# EAGLE board am-1801 (EAGLE 6.4)
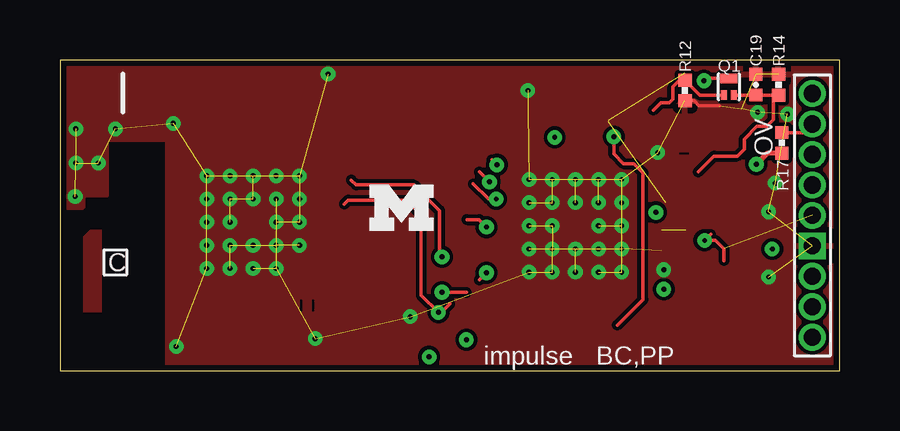
[diagram p0: board, top side]
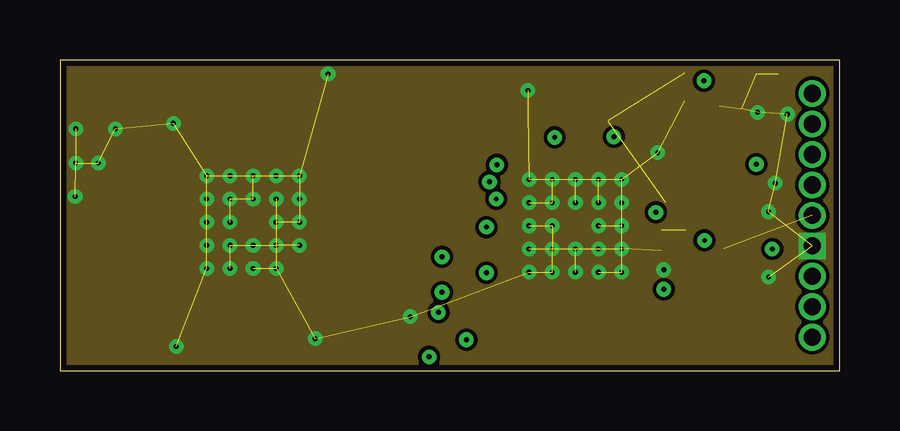
[diagram p1: board, inner layer Route2]
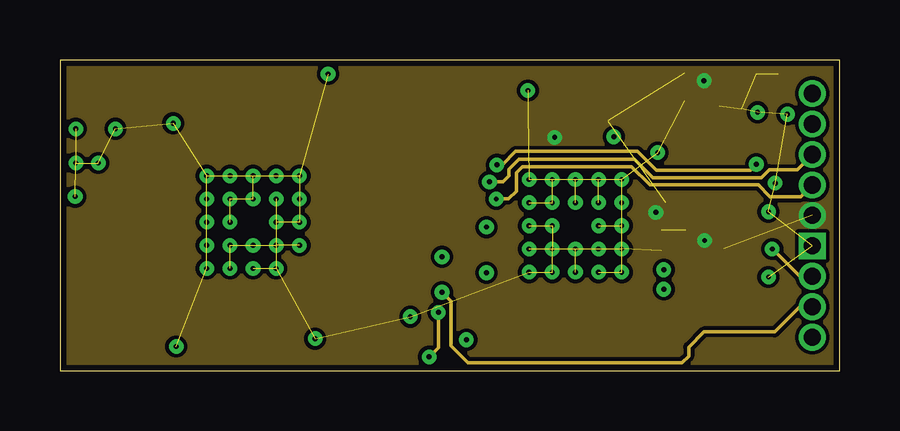
[diagram p2: board, inner layer Route15]
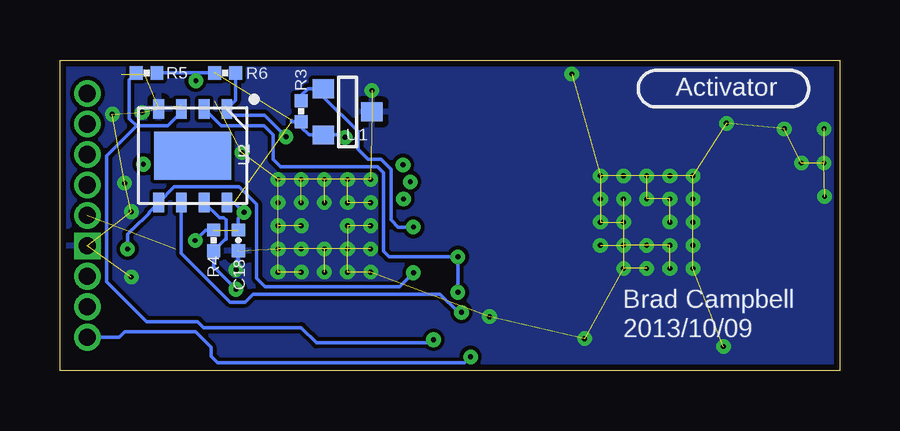
[diagram p3: board, bottom side, seen from below]

Size 32.51 x 12.95 mm. Coordinates in mm from the lower left corner, seen from the top.
Outline: 0,0 32.51,0 32.51,12.95 0,12.95 0,0
Copper layers (1+2*15+16): Top 0.0178mm / dielectric 12mil / Route2 0.0356mm / dielectric 28mil / Route15 0.0356mm / dielectric 12mil / Bottom 0.0178mm
Design rules "sunstone-4lyr_v1.0.0.3 *": minimum track width 6mil, minimum drill 8mil, track to track 6mil, track to pad 6mil, pad to pad 6mil, via to via 6mil, smd to smd 6mil, copper to edge 10mil, drill to drill 16mil, minimum pad ring 8mil, minimum via ring 8mil, stop-mask expansion 3mil, vias tented up to drill 8mil, thermal gap 10mil
tRestrict: area 10,2.5 to 10.1,3; area 10.5,2.5 to 10.6,3; area 25.8,9 to 26.2,9.1

## Footprints (pad centres in the part's own frame; a part is rotated, then mirrored left to right if it is on the bottom)
0402_CAP = smd 0.536 x 0.546: 1 -0.433,0; 2 0.433,0
HEADER1X9/0.05IN = drill 0.711 pad 1.016 square: 0 -1.27,0 | drill 0.711 pad 1.016: 1 0,0; 2 1.27,0; 3 2.54,0; 4 3.81,0; 5 5.08,0; -1 -2.54,0; -2 -3.81,0; -3 -5.08,0
XFDFN-3 = smd 0.4 x 0.7: D 0.35,0 | smd 0.4 x 0.25: G -0.35,0.215; S -0.35,-0.215
0402_RES = smd 0.536 x 0.546: 1 -0.433,0; 2 0.433,0
SOT-23 = smd 0.787 x 0.889: 1 0.991,1.016; 2 -0.94,1.016; 3 0.025,-1.016
TDFN-8 = smd 0.45 x 0.8: 1 -1.425,-1.95; 2 -0.475,-1.95; 3 0.475,-1.95; 4 1.425,-1.95; 5 1.425,1.95; 6 0.475,1.95; 7 -0.475,1.95; 8 -1.425,1.95 | smd 3.2 x 2: NC 0,0

## Placement (x,y rotation side)
C18  0.1uF  [0402_CAP]  25.07,5.44 270 bottom
C19  2.2uF  [0402_CAP]  29,11.93 90 top
J3  IMPULSE_GECKO_HEADER  [HEADER1X9/0.05IN]  31.37,6.48 90 top
Q1  MOSFET-NCHANNELXFDN-3  [XFDFN-3]  27.89,11.84 90 top
R3  2.2k  [0402_RES]  22.45,10.82 270 bottom
R4  4.7k  [0402_RES]  26.1,5.44 90 bottom
R5  4.7k  [0402_RES]  28.91,12.41 0 bottom
R6  4.7k  [0402_RES]  25.63,12.41 180 bottom
R12  1M  [0402_RES]  26.06,11.68 90 top
R14  4.7M  [0402_RES]  29.96,11.92 270 top
R17  0  [0402_RES]  30.1,9.5 270 top
U1  DS2411  [SOT-23]  20.52,10.77 90 bottom
U2  FM25LBTDFN-8  [TDFN-8]  26.98,8.97 180 bottom
U$1  UMICH_SOLID_SMALL  [UMICH_SOLID_75MIL]  12.9,5.84 0 top

## Library data of the parts
C18 C19 R3-R6 R12 R14 R17 = passives
J3 = gecko
Q1 = fets; DIGIKEY: DMN2400UFB4-7DICT-ND
U1 = chips; DIGIKEY: DS2411R+CT-ND
U2 = chips; DIGIKEY: FM25L04B-DGRA-ND; MOUSER: 877-FM25L04B-DG
U$1 = logos

## Nets
!FRAM_CS: R6.1 U2.1
!FRAM_HOLD: R4.1 U2.7
!FRAM_WP: R5.1 U2.3
GND: C18.2 C19.2 J3.0 R12.1 R14.1 U1.3 U2.4
MISO0: J3.-2 U2.2
MOSI0: J3.-1 U2.5
ONEWIRE: R3.1 U1.1
OV: R17.2
OV-HEADER: J3.4 R17.1
SCLK0: J3.-3 U2.6
SHD: J3.3
TIME_CTL: Q1.G R12.2
TRIG: J3.2
V_TIMER: C19.1 Q1.S R14.2
VCAP: J3.5
VCC: C18.1 J3.1 Q1.D R3.2 R4.2 R5.2 R6.2 U1.2 U2.8

## Tracks (layer width: path | path; a pad name or v marks a point on that pad's centre or on a via)
!FRAM_CS  (via drill 0.2)
  Top 0.152: 23.24,1.9 24.31,2.97 24.31,8.26 23.93,8.64 23.5,8.64 23.09,9.04 v23.09,9.75
  Bottom 0.152: v23.09,9.75 23.99,10.65 25.29,10.65 U2.1 25.2,11.27 R6.1
!FRAM_HOLD  (via drill 0.2)
  Top 0.152: 25.28,3.29 v25.17,3.4
  Bottom 0.152: 26.48,7.02 U2.7 25.86,6.38 25.68,6.38 25.59,6.29 25.59,5.49 25.62,5.49 R4.1 26.1,4.34 v25.17,3.4
!FRAM_WP  (via drill 0.2)
  Top 0.152: 16.96,1.32 v16.94,1.29
  Bottom 0.152: v16.94,1.29 17.07,1.17 21.82,1.17 22.45,1.8 26.52,1.8 26.77,2.06 28.91,2.06 30.56,3.71 30.56,8.97 29.31,10.21 | 29.31,10.21 28.02,10.21 27.45,10.78 U2.3 | R5.1 29.62,12.13 29.62,10.52 29.31,10.21
GND  (via drill 0.2)  (70 unrouted)
  Top 0.152: 27.48,11.05 26.64,11.05 26.44,11.25 R12.1
  Bottom 0.152: v25.17,4.22 25.07,4.31 C18.2
  other vias: 22.45,6.05 23.42,6.05 21.49,7.01 21.49,7.98 22.45,7.98 22.45,7.01 23.42,7.01 23.42,7.98 23.42,5.08 23.42,4.11 22.45,4.11 22.45,5.08 21.49,5.08 21.49,4.11 20.52,4.11 20.52,5.08 20.52,6.05 20.52,7.01 20.52,7.98 19.56,7.98 19.56,7.01 19.56,6.05 19.56,5.08 19.56,4.11 24.92,9.09 29.54,3.91 30.33,10.69 29.08,10.77 19.51,11.68 9.02,6.2 9.98,6.2 9.98,7.16 9.02,7.16 8.05,7.16 7.09,7.16 6.12,7.16 6.12,6.2 7.09,6.2 7.09,5.23 7.09,4.27 9.02,4.27 8.05,4.27 8.05,5.23 9.02,5.23 9.98,5.23 6.12,4.27 6.12,5.23 6.12,8.13 7.09,8.13 8.05,8.13 9.98,8.13 9.02,8.13 4.85,1.02 4.72,10.31 11.18,12.37 10.64,1.35 0.64,7.26 0.66,8.66 1.6,8.66 2.31,10.08 0.66,10.08 14.61,2.26 29.54,6.63 29.82,7.82
  pour Top: 33.02,13.72 33.02,-0.51 4.5,-0.51 4.5,9.63 1.93,9.63 1.93,7.32 0.94,7.32 0.94,6.81 -0.56,6.81 -0.56,13.72
  pour Bottom: -0.56,13.72 33.02,13.72 33.02,-0.51 -0.56,-0.51
  pour Route2 (no thermals): -0.66,14.22 33.53,14.22 33.53,-1.02 -0.66,-1.02
MISO0  (via drill 0.2)
  Top 0.152: v15.93,3.28 16.95,3.28 | 12.14,7.95 12.34,7.75 14.76,7.75 15.82,6.68 15.82,4.85 v15.93,4.75
  Route15 0.152: J3.-2 30.84,2.67 29.79,1.63 26.85,1.63 26.21,0.99 26.21,0.61 25.93,0.33 17.02,0.33 16.31,1.04 16.31,2.9 v15.93,3.28
  Bottom 0.152: v15.93,3.28 v15.93,4.75 18.8,4.75 19.02,4.98 19.02,8.26 19.28,8.51 23.32,8.51 23.62,8.81 23.62,9.83 24,10.21 25.8,10.21 U2.2
MOSI0  (via drill 0.2)
  Top 0.152: v17.78,4.09 17.49,3.79
  Route15 0.152: J3.-1 30.84,3.94 v29.69,5.08
  Bottom 0.152: v17.78,4.09 18.36,3.5 23.95,3.5 24.31,3.86 24.31,6.93 25.04,7.67 27.75,7.67 U2.5 28.8,6.61 28.8,6.58 29.51,5.88 29.52,5.88 29.69,5.7 v29.69,5.08
ONEWIRE  (via drill 0.2)
  Top 0.152: 16.97,6.3 17.48,6.3 v17.78,5.99
  Bottom 0.152: v17.78,5.99 18.41,5.99 18.72,6.3 18.72,8.41 19.13,8.81 19.66,8.81 20.09,9.25 20.09,9.98 21.54,11.43 U1.1 22.17,11.76 22.45,11.48 R3.1
OV  (via drill 0.2)
  Top 0.152: R17.2 | 18,8.79 v18.21,8.59
  Top 0.203: R17.2 29.49,9.07 v29.03,8.61
  Route15 0.152: v18.21,8.59 18.44,8.59 19,9.14 24.08,9.14 24.87,8.36 28.78,8.36 v29.03,8.61
OV-HEADER
  Top 0.152: R17.1 31.02,9.93 J3.4
SCLK0  (via drill 0.2)
  Top 0.152: 11.85,6.95 12.01,7.11 14.45,7.11 15.06,6.5 15.06,3.15 v15.77,2.44 15.9,2.44 16.26,2.79
  Route15 0.152: v15.77,2.44 15.77,0.96 v15.39,0.58
  Bottom 0.152: v15.77,2.44 15.9,2.44 16.66,3.2 24.46,3.2 24.79,2.87 25.43,2.87 27.45,4.89 U2.6 | J3.-3 30.05,1.4 29.82,1.63 26.85,1.63 26.21,0.99 26.21,0.61 25.93,0.33 15.65,0.33 v15.39,0.58
SHD  (via drill 0.2)
  Top 0.152: 17.49,8.29 v17.91,7.87
  Route15 0.152: v17.91,7.87 18.47,7.87 18.72,8.13 18.72,8.41 19.13,8.81 23.95,8.81 24.71,8.05 29.23,8.05 29.57,8.38 30.73,8.38 J3.3
TIME_CTL
  Top 0.152: Q1.G 26.69,11.49 R12.2 25.83,12.12 25.55,11.84 25.55,11.33 25.4,11.18 25.04,11.18 24.74,10.87
TRIG  (via drill 0.2)
  Top 0.152: v18.19,7.16 17.86,7.16 17.22,7.79
  Route15 0.152: v18.19,7.16 18.69,7.16 19.02,7.49 19.02,8.26 19.28,8.51 23.82,8.51 24.59,7.75 29.11,7.75 29.59,7.26 30.89,7.26 J3.2
UNBAL
  pour Top (no thermals): 1.74,5.88 1.74,2.44 0.98,2.44 0.98,5.59 1.27,5.88
V_TIMER
  Top 0.152: C19.1 | C19.1 R14.2 29.74,11.28 29.74,10.46 29.46,10.19 29.06,10.19 28.52,9.65 28.52,9.25 28.23,8.95 27.27,8.95 26.61,8.29 | C19.1 Q1.S
VCC  (via drill 0.2)  (4 unrouted)
  Top 0.152: 27.13,5.69 v26.87,5.44 27.33,5.44 27.69,5.08 27.69,4.6 | Q1.D 26.95,12.19 v26.85,12.09
  Bottom 0.152: 22.86,10.39 22.86,10.44 22.81,10.39 R3.2 22.45,10.16 22.13,9.83 U1.2 20.73,9.83 v20.62,9.73 | R6.2 26.92,12.41 | 26.92,12.41 R5.2 | v26.85,12.09 26.85,12.34 26.92,12.41 | R4.2 26.44,5.87 v26.87,5.44 | C18.1 25.07,6.37 v24.84,6.6 25.25,7.02 U2.8
  pour Route15 (no thermals): -0.66,13.72 33.53,13.72 33.53,-1.02 -0.66,-1.02

## Text on the board
tPlace: OV | C | impulse | BC,PP
bPlace: Activator | Brad Campbell | 2013/10/09
tDocu: VCAP | OVERVOLT | SHUTDOWN | TRIGGER | VREG | GND | MOSI | MISO | SCL